# EAGLE board uln_0.02_backup (EAGLE 8.0.0)
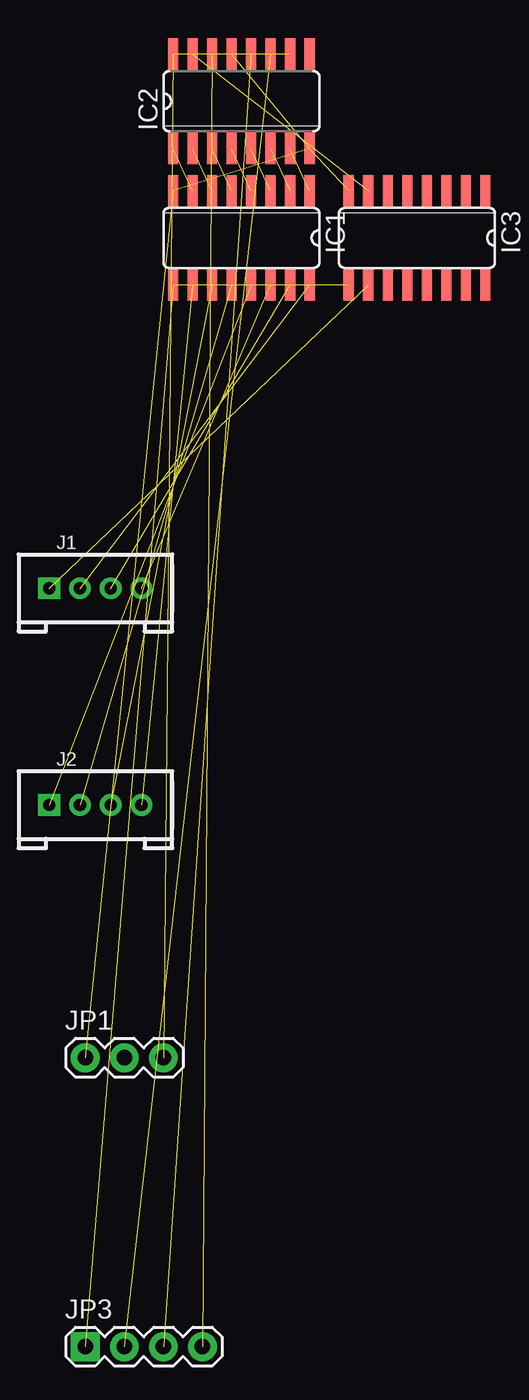
[diagram p0: board, top side]
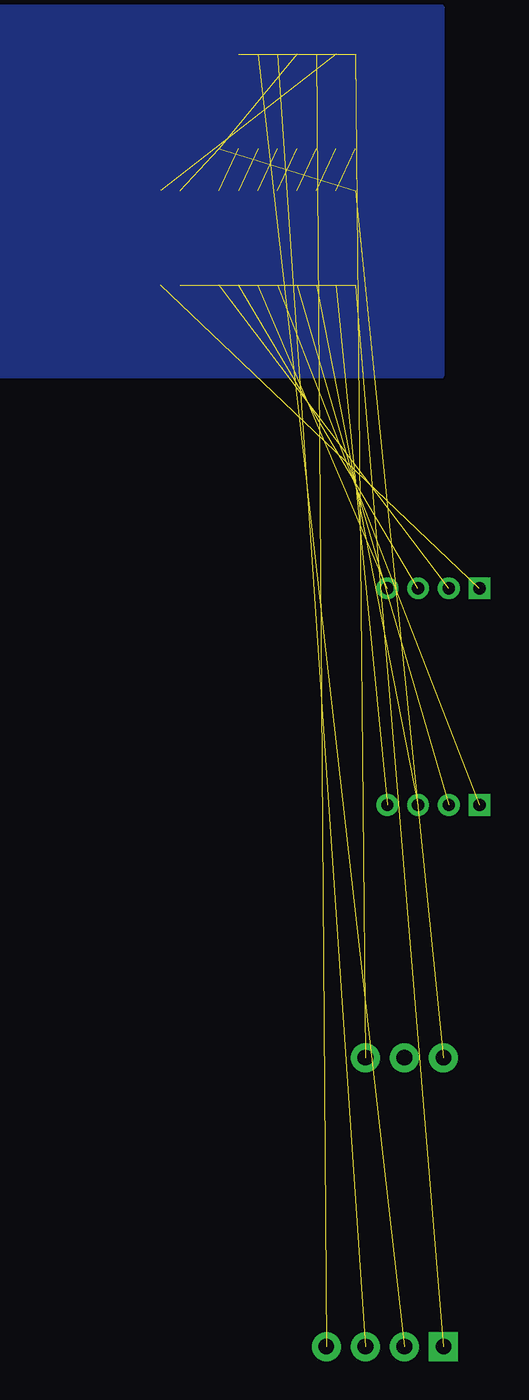
[diagram p1: board, bottom side, seen from below]

No outline drawn. Coordinates in mm, seen from the top.
Copper layers (1*16): Top 0.035mm / dielectric 1.5mm / Bottom 0.035mm
Design rules "SparkFun": minimum track width 8mil, minimum drill 20mil, track to track 8mil, track to pad 8mil, pad to pad 8mil, via to via 8mil, smd to smd 8mil, copper to edge 8mil, drill to drill 8mil, minimum pad ring 12mil, minimum via ring 10mil, stop-mask expansion 4mil, vias tented up to drill 20mil, thermal gap 10mil

## Footprints (pad centres in the part's own frame; a part is rotated, then mirrored left to right if it is on the bottom)
SO16 = smd 0.66 x 2.032: 1 -4.445,-3.073; 2 -3.175,-3.073; 3 -1.905,-3.073; 4 -0.635,-3.073; 5 0.635,-3.073; 6 1.905,-3.073; 7 3.175,-3.073; 8 4.445,-3.073; 9 4.445,3.073; 10 3.175,3.073; 11 1.905,3.073; 12 0.635,3.073; 13 -0.635,3.073; 14 -1.905,3.073; 15 -3.175,3.073; 16 -4.445,3.073
HW4-2.0 = drill 0.8 pad 1.27 square: 1 -3,0 | drill 0.8 pad 1.27: 2 -1,0; 3 1,0; 4 3,0
1X03 = drill 1.016 pad 1.88: 1 0,0; 2 2.54,0; 3 5.08,0
1X04 = drill 1.016 pad 1.88 square: 1 0,0 | drill 1.016 pad 1.88: 2 2.54,0; 3 5.08,0; 4 7.62,0

## Placement (x,y rotation side)
IC1  ULN2003AD  [SO16]  10.16,8.89 180 top
IC2  74HC595D  [SO16]  10.16,17.78 0 top
IC3  ULN2003AD  [SO16]  21.59,8.89 180 top
J1  4P-2.0  [HW4-2.0]  0.65,-13.91 0 top
J2  4P-2.0  [HW4-2.0]  0.65,-28 0 top
JP1  [1X03]  0,-44.45 0 top
JP3  [1X04]  0,-63.24 0 top

## Library data of the parts
IC1 IC3 = uln-udn
IC2 = 74xx-eu
J1 J2 = Seeed-OPL-Connector
JP1 JP3 = SparkFun

## Nets
5V: IC2.10 IC2.16 JP1.3
GND: IC1.8 IC2.8 IC2.13 IC3.8 JP1.1
N$1: IC1.7 IC2.1
N$2: IC1.6 IC2.2
N$3: IC1.5 IC2.3
N$4: IC1.4 IC2.4
N$5: IC1.3 IC2.5
N$6: IC1.2 IC2.6
N$7: IC1.1 IC2.7
N$8: IC2.15 IC3.7
N$9: IC1.10 J2.4
N$10: IC1.11 J2.3
N$11: IC1.12 J2.2
N$12: IC1.13 J2.1
N$13: IC1.14 J1.4
N$14: IC1.15 J1.3
N$15: IC1.16 J1.2
N$16: IC3.10 J1.1
N$17: IC2.11 JP3.2
N$18: IC2.12 JP3.3
N$19: IC2.14 JP3.4
VCC: IC1.9 IC3.9 JP3.1

## Tracks (layer width: path | path; a pad name or v marks a point on that pad's centre or on a via)
5V  (2 unrouted)
GND  (4 unrouted)
N$1  (1 unrouted)
N$2  (1 unrouted)
N$3  (1 unrouted)
N$4  (1 unrouted)
N$5  (1 unrouted)
N$6  (1 unrouted)
N$7  (1 unrouted)
N$8  (1 unrouted)
N$9  (1 unrouted)
N$10  (1 unrouted)
N$11  (1 unrouted)
N$12  (1 unrouted)
N$13  (1 unrouted)
N$14  (1 unrouted)
N$15  (1 unrouted)
N$16  (1 unrouted)
N$17  (1 unrouted)
N$18  (1 unrouted)
N$19  (1 unrouted)
N$20
  pour Bottom: 0.14,-0.07 30.33,-0.07 30.33,23.9 0.14,23.9
VCC  (2 unrouted)